# Altium PCB 宁波2号线PIS_数字功率放大器_功放板(BHC-A-2030-01)_PCB(06001536)_V1.0.PcbDoc (part 2 of 3)
Units mm, origin at the board's own origin, x right, y up, seen from the top; angles counter-clockwise.
Board outline 162 x 100 mm, 2 copper layers (Top Layer, Bottom Layer); 141 components, 101 nets, 408 pads, 79 vias.
Unrouted connection lines stored in the file: 2.
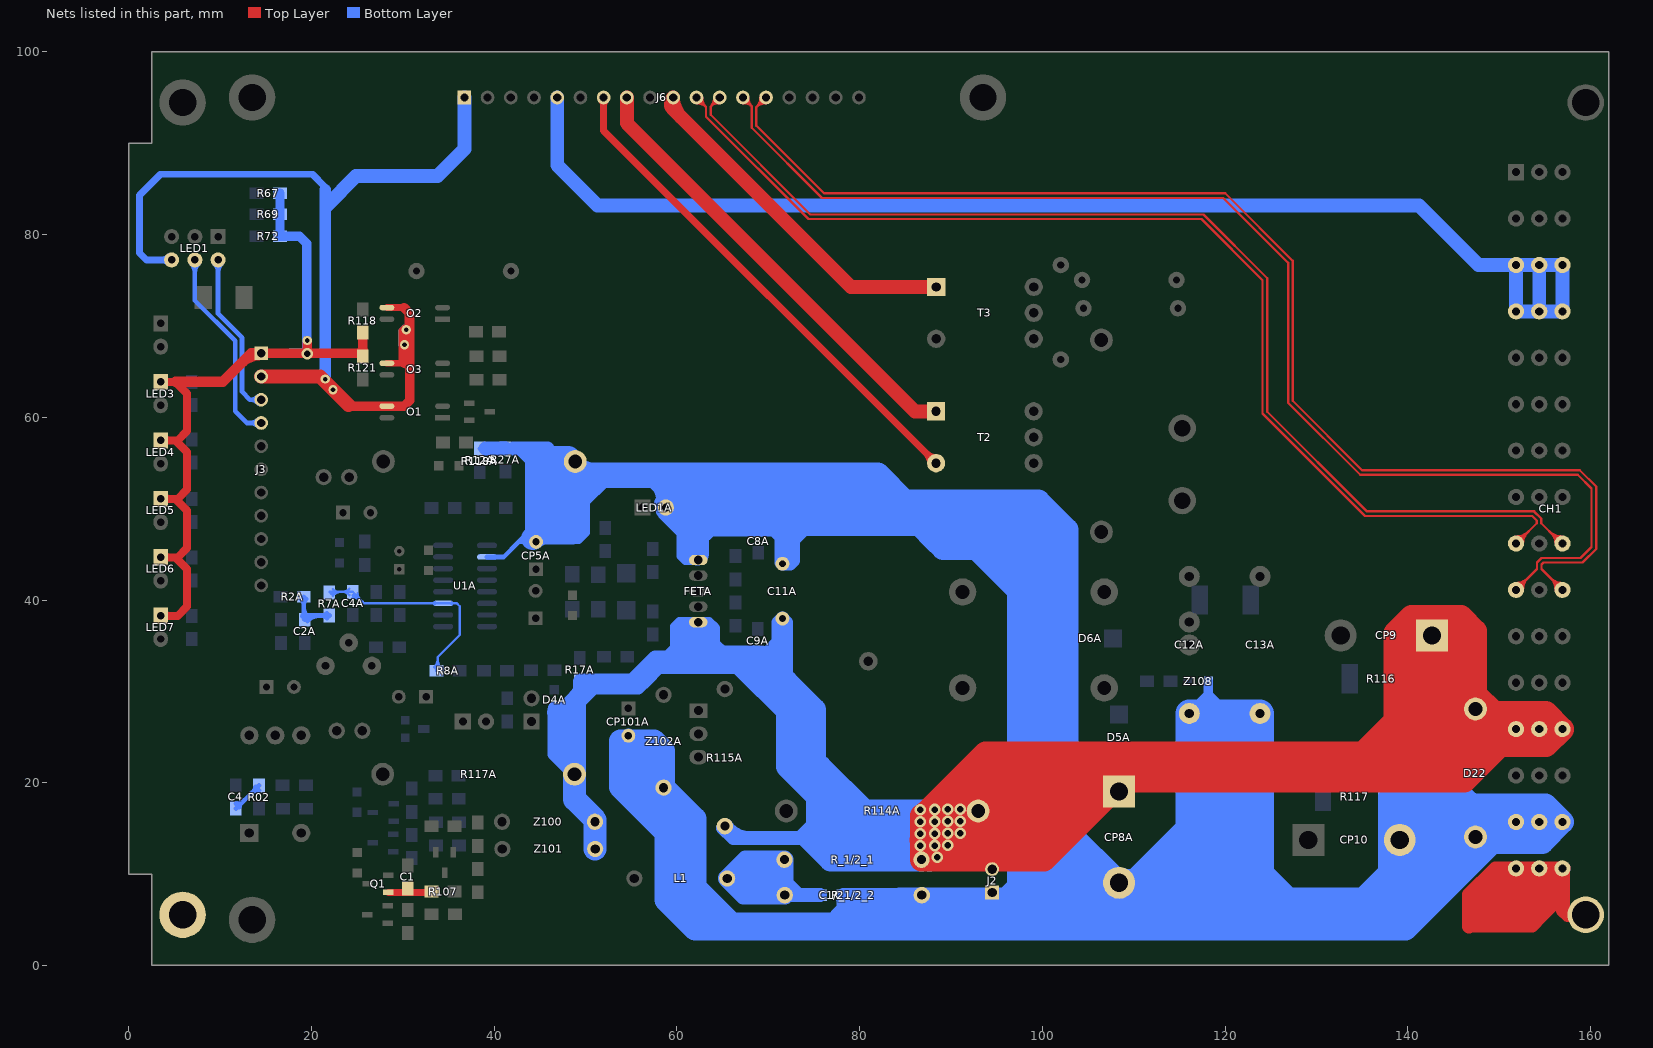
[diagram p2: the nets of this part, all layers, seen from the top]

## Via types
v1: diameter 1.016, hole 0.508, Top Layer to Bottom Layer, 57 vias
v2: diameter 1.27, hole 0.711, Top Layer to Bottom Layer, 21 vias
v3: diameter 0.762, hole 0.457, Top Layer to Bottom Layer, 1 vias

## Nets (pads, with @x,y where several pads share a name; then routed paths per layer and width w, separated by ;. In a path a pad name is that pad's centre, name@x,y a point inside that pad or via, vN(x,y) a via of type N, cw(c..) or ccw(c..) an arc to the next point about the centre after c; other vN are vias at no path point) (continued)
DC110CVGND: C1/2.1 C8A.1 C11A.1 C12A.1 C13A.1 CH1.B30 CH1.D30 CH1.Z30 CP5A.2 CP8A.2 CP10.2 CP101A.2 D6A.1 D22.2 FETA.1 J2.1 LED1A.2 R12A.1 R27A.1 R117.1 R118A.1 R_1/2_2.1 U1A.10 Z102A.1 Z108.1 | length 1336.4
  Bottom Layer w0.508: R12A.1@38.413,56.572 42.186,56.572 ; R12A.1@38.683,56.303 cw(c39.333,55.653) 39.333,56.572 cw(c39.333,57.492) R12A.1@38.683,56.842 ; U1A.10@39.213,44.711 41.057,44.711 42.711,46.364 ; 40.258,56.572 ccw(c40.258,57.578) R27A.1@40.969,56.867 ; 40.379,56.572 cw(c40.379,55.738) R27A.1@40.969,56.328 ; R27A.1@41.238,56.597 42.564,56.597 ; R27A.1@41.508,56.867 ccw(c42.158,57.517) 42.158,56.597 ccw(c42.158,55.678) 41.508,56.328 cw(c42.098,55.738) 42.098,56.572 ; R27A.1@41.514,56.86 ccw(c42.186,57.5) 42.186,56.572 ; CP5A.2@44.229,46.005 ccw(c43.361,45.138) 43.361,46.364 ccw(c43.361,47.591) CP5A.2@44.229,46.724 ; 44.827,55.607 43.862,56.572 43.837,56.597 ; CP5A.2@44.947,46.005 cw(c45.814,45.138) 45.814,46.364 cw(c45.814,47.591) CP5A.2@44.947,46.724 ; 46.812,55.607 45.847,56.572 45.822,56.597 43.837,56.597 ; 57.918,50.312 ccw(c59.131,50.045) 58.253,49.167 ; 58.238,50.889 ccw(c58.886,50.889) LED1A.2@58.803,50.247 ; LED1A.2@58.414,50.203 ccw(c60.205,49.808) 58.908,48.511 ; LED1A.2@58.868,50.751 cw(c58.961,51.467) 58.238,51.467 ; LED1A.2@58.91,50.093 ccw(c61.279,49.571) 59.564,47.856 ; LED1A.2@59.406,49.984 ccw(c62.353,49.334) 60.219,47.2 ; 61.047,44.406 cw(c61.047,43.54) FETA.1@61.659,44.152 ; 61.187,44.406 ccw(c61.187,45.073) FETA.1@61.659,44.602 ; FETA.1@61.6,44.52 cw(c60.88,44.881) 60.88,44.076 ; 62.252,45.066 61.591,44.406 61.032,44.406 60.702,44.736 60.702,46.616 60.22,46.616 ; FETA.1@62.328,44.377 62.027,44.076 60.88,44.076 ; 42.186,56.572 43.633,55.125 43.633,47.287 42.711,46.364 ; 42.564,56.597 42.589,56.572 43.256,55.905 ; 42.564,56.597 43.256,56.597 ; 42.711,46.364 43.252,46.364 ; 43.252,46.364 43.827,46.939 44.014,46.939 CP5A.2@44.588,46.364 ; 43.252,46.364 CP5A.2@44.588,46.364 ; 43.256,55.905 44.827,54.334 44.827,54.261 43.256,55.832 43.256,55.905 ; 43.256,55.905 43.256,56.572 43.256,56.597 ; 43.256,56.597 43.837,56.597 ; CP5A.2@44.588,46.364 49.3,46.364 50.237,47.302 50.237,50.629 52.117,52.509 57.197,52.509 58.238,51.467 ; 58.238,51.467 58.238,49.181 60.22,47.2 ; 60.22,46.616 60.22,44.736 60.88,44.076 ; 60.22,46.616 60.22,47.2
  Bottom Layer w1.016: C12A.1@116.078,27.584 118.161,29.667 ; Z108.1@118.161,31.115 118.161,29.693 ; 118.186,27.584 118.161,27.61 118.161,29.667 ; 120.269,27.584 118.161,29.693 ; 118.161,29.667 118.161,29.693
  Bottom Layer w1.524: R12A.1@39.047,56.597 R27A.1@41.238,56.597 ; 42.186,56.572 42.589,56.572 43.256,56.572 43.862,56.572 45.847,56.572 ; CP101A.2@54.682,25.15 54.682,24.569 54.682,21.698 55.8,20.581 55.876,20.581 ; Z102A.1@58.446,19.382 ccw(c55.876,17.228) 55.876,20.581 ; 59.051,20.581 58.543,20.581 57.997,20.581 55.876,20.581 ; 62.252,47.225 63.166,47.225 63.632,47.692 ; 63.776,48.749 64.055,48.47 ; 64.893,4.553 64.9,4.547 65.452,3.995 65.459,3.988 65.808,3.639 ; 67.682,48.47 cw(c67.682,46.553) 69.037,47.908 ccw(c68.111,46.982) 68.111,48.292 ; 68.794,3.632 84.466,3.632 84.821,3.988 86.803,5.969 101.016,5.969 105.315,5.969 106.509,7.163 106.611,7.265 106.841,7.495 CP8A.2@108.393,9.046 ; C8A.1@68.858,47.908 cw(c69.784,46.982) 69.784,48.292 ; 69.11,49.765 68.948,49.603 C8A.1@68.948,48.47 ; 71.421,45.671 ccw(c72.635,45.671) 71.777,44.812 ; 71.7,49.765 71.421,49.486 71.421,48.292 ; 72.557,45.136 cw(c71.777,45.916) 71.777,44.812 ; 74.418,48.292 72.716,46.59 ; 76.566,4.547 78.201,6.182 ; C1/2.1@78.249,7.596 ccw(c79.306,8.919) 80.503,7.722 ; R_1/2_2.1@86.549,7.722 82.51,7.722 ; CP8A.2@107.405,9.046 cw(c105.019,9.046) 106.706,7.36 cw(c108.393,5.673) CP8A.2@108.393,8.058 ; 142.801,9.046 D22.2@146.924,13.17 ; 144.733,10.979 ccw(c141.111,14.601) 146.233,14.601 ; 145.362,13.17 D22.2@146.924,13.17 ; 145.542,13.256 145.807,13.256 ; 145.769,13.17 ccw(c145.769,15.553) D22.2@147.454,13.868 ; D22.2@148.152,13.17 D22.2@146.924,13.17 ; 63.632,47.692 64.833,47.692 ; 63.632,47.692 64.233,48.292 ; 64.055,48.47 64.233,48.292 ; 64.055,48.47 C8A.1@68.948,48.47 ; 64.233,48.292 C8A.1@68.948,48.292 ; 64.233,48.292 64.833,47.692 ; 64.833,47.692 C8A.1@68.948,47.692 ; C8A.1@68.948,47.692 C8A.1@68.948,48.292 ; C8A.1@68.948,47.692 70.65,47.692 71.421,46.921 ; C8A.1@68.948,48.292 C8A.1@68.948,48.47 ; C8A.1@68.948,48.292 71.421,48.292 ; 71.421,45.168 71.421,44.101 C11A.1@71.552,43.97 ; 71.421,45.168 71.421,46.921 ; 71.421,45.168 71.552,45.037 C11A.1@71.552,43.97 ; 71.421,46.921 71.421,48.292 ; 71.421,48.292 72.716,48.292 72.716,46.59 ; C11A.1@71.552,43.97 72.367,43.97 72.716,44.319 72.716,46.59 ; 71.777,44.812 ccw(c70.565,46.59) 72.716,46.59 ; 78.201,6.182 78.228,6.208 C1/2.1@78.228,7.722 ; 78.201,6.182 78.201,4.868 78.522,4.547 78.522,7.427 80.097,5.853 80.097,4.547 82.51,6.96 82.51,7.722 ; 78.201,6.182 C1/2.1@78.201,7.695 C1/2.1@78.228,7.722 ; C1/2.1@78.228,7.722 80.503,7.722 ; 80.503,7.722 79.513,6.731 79.513,6.503 81.291,6.503 82.51,7.722 ; 80.503,7.722 82.51,7.722
  Bottom Layer w1.778: 134.576,7.239 137.613,10.276 ; 139.355,7.163 137.613,8.905 137.613,10.276 ; 139.522,9.271 137.613,11.18 ; D22.2@147.454,13.868 147.454,14.009 147.454,15.545 147.454,15.71 147.454,17.57 146.025,18.999 138.121,18.999 R117.1@137.613,18.491 137.613,11.18 ; 137.613,10.276 137.613,11.18
  Bottom Layer w2.54: CP5A.2@44.229,46.724 cw(c45.747,45.206) 45.747,47.352 ; 44.827,54.334 44.827,55.607 R118A.1@48.1,55.607 ; 46.504,52.28 cw(c50.618,52.28) R118A.1@47.709,55.19 ; 46.504,53.273 cw(c48.632,53.273) R118A.1@47.714,55.194 ; R118A.1@47.703,55.176 ccw(c49.831,55.176) 48.326,53.67 ; R118A.1@47.703,55.177 ccw(c49.435,55.021) 48.205,53.791 ; R118A.1@47.705,55.184 ccw(c50.064,54.025) 48.205,52.166 ; R118A.1@47.709,55.161 ccw(c51.017,58.469) 51.017,53.791 ; R118A.1@47.74,55.165 cw(c45.297,56.65) 45.297,53.791 ; 57.741,53.565 cw(c54.297,50.121) LED1A.2@59.167,50.121 ; Z102A.1@58.27,19.729 ccw(c59.625,18.412) 58.289,17.076 ; 58.391,17.076 58.289,17.076 ; Z102A.1@58.739,19.137 cw(c57.533,21.145) 55.876,19.489 ; LED1A.2@58.786,50.502 cw(c58.786,45.631) 62.231,49.075 ; 64.893,4.553 65.96,4.553 61.947,8.567 61.947,16.06 60.296,17.711 ; 65.452,3.995 61.998,3.995 ; 72.716,48.292 74.418,48.292 86.506,48.292 ; 84.781,49.765 82.419,49.765 ; 97.5,11.938 97.5,8.738 ; 100.239,14.097 101.041,13.295 ; 101.016,5.969 101.041,5.995 101.041,7.265 ; 101.671,9.614 104.02,7.265 ; 106.509,7.163 114.098,7.163 ; 106.611,7.265 104.02,7.265 ; 106.841,7.495 101.041,13.295 ; 106.936,7.59 ccw(c107.966,8.62) 107.966,7.163 ; CP8A.2@108.001,9.324 cw(c104.02,12.142) 104.02,7.265 ; CP8A.2@108.393,9.046 102.672,14.767 102.672,47.696 99.543,50.825 84.938,50.825 ; CP8A.2@108.732,9.386 ccw(c114.098,14.752) 114.098,7.163 ; 123.76,7.239 126.568,7.239 134.576,7.239 ; 139.598,7.163 139.355,7.163 ; 142.316,12.573 142.316,13.157 142.265,13.208 ; D22.2@146.701,14.6 ccw(c148.152,14.621) D22.2@148.152,13.17 ; D22.2@146.703,14.592 ccw(c148.918,15.606) 148.918,13.17 ; D22.2@147.396,14.067 147.454,14.009 147.963,13.5 154.71,13.5 CH1.Z30@156.92,15.71 ; 147.454,15.545 147.289,15.71 ; 45.297,53.791 46.58,53.791 ; 45.297,53.791 44.827,54.261 44.827,47.352 46.504,47.352 ; 46.504,47.352 48.51,47.352 ; 46.504,47.352 46.504,53.715 46.58,53.791 ; 46.58,53.791 48.205,53.791 ; 46.58,53.791 48.205,52.166 ; 48.205,52.166 48.205,53.791 ; 48.205,53.791 48.51,53.486 48.51,47.352 ; 48.205,53.791 61.02,53.791 ; 48.51,47.352 49.171,48.013 49.171,50.985 51.914,53.728 57.578,53.728 59.204,52.102 ; 55.876,19.489 55.876,20.581 55.876,22.968 57.476,24.569 ; 55.876,19.489 58.289,17.076 ; 57.476,24.569 57.997,24.048 ; 57.476,24.569 54.682,24.569 53.819,24.569 53.819,19.539 58.797,14.561 58.797,7.195 61.998,3.995 ; 57.997,24.048 58.543,23.502 58.543,20.581 Z102A.1@58.543,19.463 ; 57.997,24.048 57.997,20.581 57.997,20.009 Z102A.1@58.543,19.463 ; Z102A.1@58.543,19.463 60.296,17.711 ; 59.204,52.102 62.252,49.054 ; 59.204,52.102 59.204,49.943 61.375,47.771 ; 60.296,17.711 60.296,15.399 60.448,15.247 60.448,8.084 63.217,5.315 63.369,5.315 64.138,4.547 64.9,4.547 76.566,4.547 78.522,4.547 80.097,4.547 81.697,4.547 84.415,7.265 R_1/2_2.1@86.549,7.265 ; 61.02,53.791 62.252,52.559 ; 61.02,53.791 78.393,53.791 ; 61.375,47.771 62.252,46.895 ; 61.375,47.771 61.375,45.943 62.252,45.066 62.252,46.895 ; 61.998,3.995 62.004,3.988 65.459,3.988 84.821,3.988 ; 62.252,46.895 62.252,47.225 ; 62.252,47.225 62.252,49.054 ; 62.252,47.225 63.776,48.749 64.792,49.765 69.11,49.765 71.7,49.765 82.419,49.765 ; 62.252,49.054 62.252,52.559 ; 62.252,52.559 62.328,52.483 ; 62.328,52.483 63.623,51.188 80.997,51.188 ; 62.328,52.483 79.701,52.483 ; 78.393,53.791 81.972,53.791 84.938,50.825 ; 78.393,53.791 79.701,52.483 ; 79.701,52.483 80.997,51.188 ; 80.997,51.188 81.359,50.825 ; 81.359,50.825 82.419,49.765 ; 81.359,50.825 84.938,50.825 ; 84.821,3.988 139.736,3.988 148.918,13.17 ; 84.821,3.988 84.821,5.537 R_1/2_2.1@86.549,7.265 ; 84.938,50.825 86.563,49.2 95.174,49.2 ; 86.506,48.292 88.24,46.558 ; 86.506,48.292 92.678,48.292 93.739,47.231 ; R_1/2_2.1@86.549,7.265 96.027,7.265 ; 88.24,46.558 94.412,46.558 ; 88.24,46.558 89.154,45.644 92.761,45.644 97.394,41.01 97.394,8.632 ; 93.739,47.231 94.412,46.558 ; 93.739,47.231 95.567,47.231 96.241,46.558 ; 94.412,46.558 99.238,41.732 99.238,7.265 ; 94.412,46.558 96.241,46.558 ; 95.174,49.2 97.815,46.558 ; 95.174,49.2 97.765,49.2 101.041,45.923 101.041,41.758 ; 96.027,7.265 97.394,8.632 ; 96.027,7.265 97.394,7.265 ; 96.241,46.558 97.815,46.558 ; 96.241,46.558 98.247,44.552 ; 97.394,7.265 97.394,8.632 ; 97.394,7.265 97.5,7.265 ; 97.394,8.632 97.5,8.738 ; 97.5,7.265 99.238,7.265 ; 97.5,7.265 97.5,8.738 ; 97.815,46.558 98.247,46.126 ; 97.815,46.558 98.4,46.558 98.45,46.507 98.247,46.507 98.247,46.126 ; 98.247,44.552 98.247,46.126 ; 98.247,44.552 99.504,43.294 ; 98.247,46.126 99.504,44.869 99.504,43.294 ; 99.238,7.265 101.041,7.265 ; 99.504,43.294 101.041,41.758 ; 101.041,7.265 104.02,7.265 ; 101.041,7.265 101.041,13.295 ; 101.041,13.295 101.041,41.758 ; 104.02,7.265 105.315,5.969 105.925,5.36 137.552,5.36 139.355,7.163 ; 114.098,7.163 115.316,7.163 116.611,7.163 120.04,7.163 139.355,7.163 ; 139.355,7.163 145.362,13.17 146.721,14.529 146.721,14.601 147.454,13.868 D22.2@148.152,13.17 ; 140.132,15.342 140.132,12.598 140.894,11.836 142.265,13.208 ; 140.132,15.342 139.954,15.519 140.132,15.519 ; 140.132,15.342 140.132,15.519 ; 140.132,15.342 142.265,13.208 ; 140.132,15.519 140.132,15.977 140.589,15.519 ; 140.132,15.519 140.589,15.519 ; 140.589,15.519 142.621,15.519 142.672,15.469 ; 140.589,15.519 140.64,15.469 142.672,15.469 ; 142.265,13.208 143.027,13.97 143.027,15.113 142.672,15.469 ; 142.672,15.469 145.415,15.469 141.445,11.499 141.445,9.304 139.112,11.637 CP10.2@139.112,13.741 139.112,17.09 139.573,17.551 143.7,17.551 ; 143.7,17.551 143.719,17.57 147.454,17.57 155.06,17.57 CH1.Z30@156.92,15.71 ; 143.7,17.551 143.77,17.551 ; 143.77,17.551 145.612,15.71 147.289,15.71 ; 143.77,17.551 145.447,17.551 147.289,15.71 ; 147.289,15.71 147.454,15.71 CH1.D30@151.84,15.71 CH1.B30@154.38,15.71 CH1.Z30@156.92,15.71 ; D22.2@148.152,13.17 148.918,13.17 ; R118A.1@47.737,55.19 cw(c45.87,53.323) 48.51,53.323 ccw(c45.87,53.323) R118A.1@47.737,55.19
  Bottom Layer w3.048: CP8A.2@108.393,9.046 110.223,9.046 ; 115.316,7.163 121.209,13.056 ; 116.611,7.163 119.431,9.982 121.209,9.982 ; 120.04,7.163 121.209,8.331 121.209,9.79 ; 120.04,25.451 121.691,25.451 ; 123.76,7.239 121.209,9.79 ; 126.568,7.239 123.825,9.982 ; 110.223,9.046 113.974,9.046 118.516,13.589 118.516,25.146 C12A.1@116.078,27.584 ; 110.223,9.046 116.078,14.902 C12A.1@116.078,27.584 ; C12A.1@116.078,27.584 118.186,27.584 120.269,27.584 C13A.1@123.825,27.584 ; 121.209,9.79 121.209,9.982 ; 121.209,9.982 121.209,13.056 ; 121.209,9.982 123.825,9.982 ; 121.209,13.056 121.209,24.968 121.691,25.451 ; 121.691,25.451 C13A.1@123.825,27.584 ; 123.825,9.982 C13A.1@123.825,27.584
DC110V+: C9A.2 C11A.2 CH1.B26 CH1.D26 CH1.Z26 CP8A.1 CP9.1 D4A.2 D5A.2 D22.1 FETA.5 J2.2 R17A.2 R114A.2 R115A.2 R116.2 R117A.2 R_1/2_1.2 Z100.2 Z101.2 | length 1049.7
  Top Layer w1.524: v2@86.582,14.526 cw(c87.232,13.499) v2@87.966,14.468 ; v2@86.591,12.994 ccw(c87.195,14.145) v2@88.04,13.158 ; v2@86.677,12.983 ccw(c86.407,14.215) 87.47,13.535 ; v2@86.677,14.295 ccw(c86.407,15.528) 87.47,14.847 ; v2@86.677,14.543 cw(c86.395,13.237) 87.518,13.961 ; v2@86.708,14.306 ccw(c86.315,15.077) v2@87.135,15.354 ; v2@86.711,13.218 cw(c86.264,12.406) R_1/2_1.2@87.147,12.122 ; R_1/2_1.2@86.766,11.583 R_1/2_1.2@86.817,11.633 ; R_1/2_1.2@86.817,11.093 cw(c89.227,11.093) v2@88.142,13.245 ; R_1/2_1.2@86.817,11.412 cw(c91.232,11.412) v2@88.11,14.534 ; R_1/2_1.2@86.817,11.583 R_1/2_1.2@86.817,11.633 ; v2@86.817,12.724 cw(c91.232,12.724) v2@88.11,15.846 ; v2@86.817,16.164 ccw(c91.232,16.164) v2@88.11,13.042 ; R_1/2_1.2@86.98,11.797 R_1/2_1.2@86.817,11.633 ; 86.98,16.459 v2@86.817,16.296 ; v2@88.153,14.326 cw(c88.936,16.296) v2@86.817,16.296 ; R_1/2_1.2@86.817,11.633 v2@86.817,16.296 ; 87.376,16.855 cw(c88.2,16.031) 88.2,17.196 ccw(c88.2,16.031) 87.376,16.855
  Top Layer w2.54: 86.746,13.734 cw(c86.65,13.106) 87.162,13.482 ; v2@86.766,12.516 cw(c90.128,12.516) 87.751,14.893 ccw(c89.61,13.034) v2@86.98,13.034 ; v2@86.766,13.828 cw(c90.128,13.828) 87.751,16.206 ccw(c89.61,14.346) v2@86.98,14.346 ; 86.766,15.06 ccw(c90.128,15.06) 87.751,12.683 ; 86.767,16.419 ccw(c86.645,17.072) 87.193,16.697 ; 86.772,13.73 cw(c86.623,12.966) 87.269,13.4 ; 86.772,15.042 cw(c86.623,14.278) 87.269,14.712 ; 86.776,12.484 ccw(c86.637,13.17) 87.22,12.783 ; 86.776,13.796 ccw(c86.637,14.482) 87.22,14.095 ; 86.776,15.109 ccw(c86.637,15.794) 87.22,15.407 ; 86.776,16.421 ccw(c86.637,17.107) 87.22,16.72 ; R_1/2_1.2@86.98,11.722 cw(c89.61,11.722) 87.751,13.581 cw(c90.039,11.292) v2@90.039,14.529 ; R_1/2_1.2@86.98,11.797 86.98,16.459 ; v2@86.98,14.542 ccw(c89.61,14.542) 87.751,12.683 ; v2@86.98,15.855 ccw(c89.61,15.855) 87.751,13.995 ccw(c89.283,15.528) v2@89.283,13.361 ; R_1/2_1.2@87.353,11.583 ccw(c87.353,15.426) 90.071,12.708 ; 87.594,13.324 cw(c89.241,12.801) v2@89.241,14.529 ; 87.654,15.432 ccw(c89.241,16.375) v2@89.241,14.529 ; 87.751,15.308 ccw(c89.63,17.187) v2@89.63,14.529 ; 87.773,13.974 cw(c89.829,16.245) 86.766,16.245 R_1/2_1.2@86.766,11.583 R_1/2_1.2@86.817,11.583 ; v2@88.055,12.286 cw(c90.651,9.69) 90.651,13.361 ; 88.084,15.132 cw(c88.33,16.459) 86.98,16.459 ; 88.2,16.434 ccw(c88.2,18.151) v2@89.414,16.937 ; v2(88.2,17.069) 92.34,21.209 135.382,21.209 140.437,26.264 ; 88.758,13.709 ccw(c90.174,13.709) 89.173,12.708 ccw(c91.891,15.426) 91.891,11.583 ; 88.758,13.918 cw(c90.174,13.918) 89.173,14.919 ; 88.758,15.022 ccw(c90.174,15.022) 89.173,14.021 ccw(c90.767,15.614) 90.767,13.361 ; 88.758,15.23 cw(c90.174,15.23) 89.173,16.231 ; 88.758,16.282 v2@88.758,13.361 ; 88.784,12.883 cw(c86.817,13.721) R_1/2_1.2@86.817,11.583 ; v2@88.987,13.157 cw(c91.685,13.157) v2@89.777,15.065 ; 88.987,14.455 cw(c91.416,14.513) v2@89.698,16.231 ; v2@88.987,14.47 cw(c91.522,14.47) v2@89.729,16.262 ; v2@88.987,15.782 cw(c90.745,15.782) v2@89.502,17.025 ; 88.994,14.563 cw(c91.044,14.26) v2@91.044,16.332 ; 89.112,12.779 cw(c90.191,13.579) v2@89.241,14.529 ; v2@89.173,13.606 cw(c91.4,11.379) v2@91.4,14.529 ; 89.173,15.333 ccw(c91.114,17.274) v2@91.114,14.529 ; v2@89.466,14.529 ccw(c89.466,17.361) v2@91.468,15.358 ; v2@89.813,13.361 ccw(c89.813,15.701) v2@91.468,14.046 ; 90.158,14.129 cw(c88.758,15.019) v2@88.758,13.361 ; v2@90.384,14.495 cw(c93.225,14.495) 91.216,16.504 ; 90.407,11.583 cw(c90.407,15.34) v2@87.751,12.683 ; v2@90.57,14.046 ccw(c92.225,15.701) 92.225,13.361 ; 90.57,14.944 cw(c93.922,11.593) R114A.2@93.922,16.332 ; v2@90.57,15.358 ccw(c92.572,17.361) 92.572,14.529 ; v2@90.57,16.671 ccw(c91.387,17.488) 91.387,16.332 ; 90.651,16.332 ccw(c90.651,17.488) v2@91.468,16.671 ; v2@90.715,16.003 cw(c92.969,13.749) R114A.2@92.969,16.937 ; v2@90.989,16.277 cw(c88.2,19.067) 88.2,15.122 ; 91.068,15.174 ccw(c90.981,16.298) 91.837,15.565 ; 91.133,15.12 ccw(c90.751,13.019) v2@89.241,14.529 ; 91.153,16.49 ccw(c90.995,17.135) 91.562,16.791 ; 91.654,14.504 ccw(c89.8,14.478) v2@89.8,16.332 ; R114A.2@92.987,16.908 cw(c89.241,18.668) v2@89.241,14.529 ; 100.366,14.529 92.568,14.529 ; 102.17,16.332 R114A.2@92.568,16.332 ; CP8A.1@106.856,18.25 100.188,11.583 R_1/2_1.2@86.817,11.583 ; 86.98,16.459 93.762,23.241 135.077,23.241 138.608,26.772 138.608,28.702 ; 88.2,15.122 ccw(c88.2,16.062) 88.864,15.397 cw(c88.2,16.062) 88.2,15.122 ; 88.517,16.519 ccw(c88.13,17.19) 88.878,16.99 ; 88.517,16.519 ccw(c88.13,17.19) 88.878,16.99 ; 88.517,16.519 ccw(c88.13,17.19) 88.878,16.99 ; 88.517,16.519 ccw(c88.13,17.19) 88.878,16.99 ; v2@88.758,13.361 92.568,13.361 ; v2@89.173,16.645 ccw(c89.929,17.401) v2@89.929,16.332 ; v2@89.173,16.645 ccw(c89.929,17.401) v2@89.929,16.332 ; v2@89.173,16.645 ccw(c89.929,17.401) v2@89.929,16.332 ; v2@89.241,14.529 v2@91.044,16.332 ; v2@89.241,14.529 92.568,14.529 ; v2@89.8,16.332 v2@91.044,16.332 ; v2@89.8,16.332 89.698,16.231 89.698,16.419 92.568,19.289 92.568,19.101 ; v2@89.8,16.332 92.568,19.101 ; v2@91.044,16.332 ccw(c92.671,14.706) 90.389,14.415 cw(c92.671,14.706) v2@91.044,16.332 ; v2@91.044,16.332 cw(c92.586,14.791) 92.973,16.936 ccw(c92.586,14.791) v2@91.044,16.332 ; v2@91.044,16.332 R114A.2@92.568,16.332 ; 91.607,16.332 ccw(c91.607,18.279) R114A.2@92.983,16.902 ; 91.607,16.332 ccw(c91.607,18.279) R114A.2@92.983,16.902 ; 91.607,16.332 ccw(c91.607,18.279) R114A.2@92.983,16.902 ; 92.568,13.361 99.35,13.361 106.183,20.193 137.033,20.193 ; 92.568,13.361 92.568,14.529 ; 92.568,14.529 R114A.2@92.568,16.332 ; R114A.2@92.568,16.332 92.568,19.101 ; 92.568,19.101 93.152,19.685 104.8,19.685 102.743,17.628 93.708,17.628 R114A.2@92.983,16.902 ; 137.033,20.193 138.316,21.476 ; 137.033,20.193 139.598,20.193 ; 138.316,21.476 138.608,21.768 ; 138.316,21.476 138.024,21.768 138.608,21.768 ; 138.316,21.476 139.598,20.193 ; 138.608,21.768 140.437,23.597 140.437,26.264 ; 138.608,21.768 143.942,21.768 142.011,23.698 142.011,28.702 ; 138.608,28.702 140.437,28.702 ; 138.608,28.702 140.437,30.531 ; 138.608,28.702 138.608,36.398 140.386,38.176 145.821,38.176 147.396,36.601 147.396,34.493 ; 139.598,20.193 142.824,20.193 ; 140.437,26.264 140.437,28.702 ; 140.437,28.702 140.437,30.531 ; 140.437,28.702 142.011,28.702 ; 140.437,30.531 141.821,31.915 ; 140.437,30.531 140.437,35.027 ; 140.437,35.027 140.97,34.493 CP9.1@142.011,34.493 ; 140.437,35.027 140.437,38.125 CP9.1@142.697,35.865 ; 141.821,31.915 141.427,32.309 142.011,32.309 ; 141.821,31.915 142.011,31.725 ; 141.821,31.915 142.011,32.106 ; 142.011,28.702 143.739,28.702 ; 142.011,28.702 142.011,31.725 ; 142.011,31.725 143.815,29.921 ; 142.011,31.725 142.011,32.106 ; 142.011,32.106 142.215,32.309 ; 142.011,32.106 142.011,32.309 ; 142.011,32.309 CP9.1@142.011,34.493 ; 142.011,32.309 142.215,32.309 ; CP9.1@142.011,34.493 142.011,35.179 CP9.1@142.697,35.865 ; CP9.1@142.011,34.493 145.567,34.493 ; 142.215,32.309 142.265,32.36 145.263,32.36 ; 142.215,32.309 145.212,32.309 145.263,32.36 ; CP9.1@142.697,35.865 145.364,35.865 145.567,35.662 145.567,34.493 ; 142.824,20.193 145.567,20.193 ; 142.824,20.193 145.567,22.936 ; 143.739,28.702 145.567,26.873 ; 143.739,28.702 143.739,24.765 145.567,22.936 ; 143.739,28.702 143.739,29.845 143.815,29.921 ; 143.739,28.702 145.034,28.702 143.815,29.921 ; 143.815,29.921 145.567,31.674 ; 145.263,32.36 145.567,32.664 ; 145.263,32.36 145.567,32.36 ; 145.567,20.193 146.163,20.193 150.035,24.065 ; 145.567,20.193 145.567,22.936 ; 145.567,22.936 145.567,26.873 ; 145.567,22.936 146.759,22.936 149.643,25.82 ; 145.567,26.873 146.621,25.82 149.643,25.82 ; 145.567,26.873 145.567,31.674 ; 145.567,31.674 145.567,32.36 ; 145.567,32.36 145.567,32.664 ; 145.567,32.664 145.567,34.493 ; 145.567,32.664 147.396,34.493 ; 145.567,34.493 147.396,34.493 ; 147.396,29.7 147.396,34.493 ; 147.396,29.7 D22.1@147.396,28.067 149.643,25.82 ; 147.396,29.7 149.396,27.7 155.09,27.7 CH1.Z26@156.92,25.87 ; 149.643,25.82 CH1.D26@151.79,25.82 ; 150.035,24.065 CH1.D26@151.79,25.82 ; 150.035,24.065 155.115,24.065 CH1.Z26@156.87,25.82 ; CH1.D26@151.79,25.82 CH1.Z26@156.87,25.82 ; CH1.D26@151.79,25.82 CH1.D26@151.84,25.87 CH1.B26@154.38,25.87 CH1.Z26@156.92,25.87 ; CH1.Z26@156.87,25.82 CH1.Z26@156.92,25.87 ; CH1.Z26@156.87,25.82 156.92,25.82 CH1.Z26@156.92,25.87 ; 88.2,13.809 ccw(c88.2,14.586) 88.749,14.037 cw(c88.2,14.586) 88.2,13.809 ; 88.517,13.682 cw(c88.107,12.972) 88.899,13.184 ccw(c88.107,12.972) 88.517,13.682 ; 88.517,13.894 ccw(c88.13,14.566) 88.878,14.365 cw(c88.13,14.566) 88.517,13.894 ; 88.517,14.994 cw(c88.107,14.284) 88.899,14.496 ccw(c88.107,14.284) 88.517,14.994 ; 88.517,15.207 ccw(c88.13,15.878) 88.878,15.677 cw(c88.13,15.878) 88.517,15.207 ; v2@91.069,15.088 ccw(c90.816,15.916) 91.58,15.509 cw(c90.816,15.916) v2@91.069,15.088
  Bottom Layer w1.143: 59.813,34.475 59.813,36.227 ; 60.654,37.068 cw(c61.883,35.838) FETA.5@61.883,37.577 ; FETA.5@61.629,37.577 ccw(c62.668,37.577) 61.933,36.843 ; 63.087,36.818 cw(c63.845,37.577) FETA.5@62.772,37.577 ; 63.741,34.255 64.131,34.645 ; 63.885,34.892 cw(c66.57,37.577) FETA.5@62.772,37.577 ; 64.002,37.068 ccw(c62.772,35.838) FETA.5@62.772,37.577 ; 66.214,33.205 65.164,34.255 64.131,35.287 ; 59.813,36.227 59.813,37.091 60.299,37.577 FETA.5@62.328,37.577 ; 59.813,36.227 61.159,37.573 61.744,37.573 62.328,36.989 62.328,36.448 64.131,34.645 ; FETA.5@62.328,37.577 64.131,35.774 ; FETA.5@62.328,37.577 63.493,37.577 64.131,36.938 64.131,35.774 ; 64.131,34.645 64.131,35.287 ; 64.131,35.287 64.131,35.774
  Bottom Layer w1.524: D4A.2@46.522,27.7 ccw(c46.729,28.628) 47.401,27.956 ; D4A.2@46.579,27.694 ccw(c46.579,29.047) 47.536,28.09 ; D4A.2@46.675,28.199 cw(c46.256,27.133) 47.401,27.133 ; D4A.2@46.764,28.141 cw(c45.226,26.603) 47.401,26.603 ; R117A.2@48.798,20.936 47.143,22.592 ; 48.84,29.394 ccw(c47.247,30.986) R17A.2@49.499,30.986 ; R17A.2@49.47,31.068 cw(c48.253,30.055) 49.372,28.936 ; R17A.2@49.477,31.058 cw(c48.744,30.555) 49.372,29.927 ; 62.328,36.448 62.328,35.668 63.741,34.255 65.164,34.255 C9A.2@68.922,34.255 ; 62.328,36.989 59.813,34.475 59.077,33.738 ; R115A.2@65.248,15.251 65.054,15.057 66.166,13.945 73.493,13.945 ; R115A.2@65.363,15.327 ccw(c67.916,17.007) 67.916,13.951 66.251,13.951 R115A.2@65.579,14.623 ; 68.226,33.205 68.897,33.205 71.12,35.428 ; 69.821,33.205 71.12,34.504 71.12,35.428 ; 71.12,36.021 71.12,35.428 ; 72.132,27.134 66.595,32.671 58.01,32.671 ; 72.785,30.24 71.958,31.067 71.958,37.564 C11A.2@71.552,37.97 71.12,37.538 71.12,35.428 ; 74.484,13.945 73.493,13.945 ; 75.119,15.57 73.493,13.945 ; 75.307,21.368 77.408,19.267 79.752,16.923 ; 47.143,22.592 46.579,23.156 D4A.2@46.579,27.956 47.401,27.956 ; 47.143,22.592 47.401,22.85 47.401,27.956 ; 47.401,27.956 48.392,27.956 48.798,28.362 49.372,28.936 ; 47.401,27.956 49.372,29.927 ; 49.372,28.936 50.847,30.411 55.749,30.411 56.537,31.198 ; 49.372,28.936 49.372,29.927 ; 49.372,29.927 R17A.2@49.372,31.113 49.457,31.198 55.089,31.198 ; 55.089,31.198 56.537,31.198 ; 55.089,31.198 56.537,32.646 ; 56.537,31.198 56.537,32.646 ; 56.537,31.198 58.01,32.671 ; 56.537,32.646 57.629,33.738 59.077,33.738 ; 58.01,32.671 59.077,33.738
  Bottom Layer w2.032: D5A.2@108.382,22.483 108.393,22.472 CP8A.1@108.393,19.046
  Bottom Layer w2.54: 48.798,28.362 R117A.2@48.798,20.936 48.798,18.184 51.05,15.933 Z101.2@51.05,12.758 ; 66.214,33.205 63.572,33.205 ; 68.897,33.205 69.821,33.205 71.958,31.067 75.032,27.994 75.032,21.772 ; C9A.2@69.371,33.679 cw(c68.226,34.824) 68.226,33.205 67.535,33.205 67.535,33.176 72.132,28.579 72.132,27.309 ; 75.307,21.368 75.032,21.644 75.032,21.772 ; 75.383,15.501 75.383,18.52 72.132,21.772 72.132,27.134 72.132,27.309 ; 75.804,15.774 76.084,15.494 78.37,15.494 ; 77.408,19.267 77.408,18.89 75.434,16.917 79.759,16.917 ; 79.752,16.923 79.759,16.917 ; 83.87,13.945 ccw(c83.87,18.511) 87.099,15.282 ; 84.443,15.494 ccw(c84.443,19.251) 87.099,16.595 ; 84.504,11.583 ccw(c84.504,15.253) v2@87.099,12.658 ; 85.322,16.917 cw(c85.322,14.403) v2@87.099,16.18 ; 85.358,13.945 ccw(c85.358,18.598) 88.649,15.308 ; 85.587,15.494 cw(c85.587,13.356) 87.099,14.868 ; 85.931,15.494 ccw(c85.931,19.338) 88.649,16.62 ; 86.02,15.657 ccw(c87.946,15.884) v2@87.946,13.945 ; 86.16,13.945 cw(c86.16,12.616) 87.099,13.556 ; 86.201,13.556 cw(c87.141,12.616) 87.141,13.945 ; 86.201,14.868 cw(c87.713,13.356) v2@87.713,15.494 ; v2@86.201,16.18 cw(c87.979,14.403) v2@87.979,16.917 ; 86.201,16.595 ccw(c88.858,19.251) 88.858,15.494 ; R_1/2_1.2@86.65,12.472 ccw(c86.65,16.995) 89.849,13.797 ; 86.65,13.784 ccw(c86.65,16.523) v2@88.587,14.586 ; R_1/2_1.2@86.766,11.583 76.846,11.583 74.484,13.945 78.37,13.945 ; v2@86.932,16.917 cw(c86.932,14.489) v2@88.649,16.206 ; v2@87.198,15.494 cw(c87.198,13.443) 88.649,14.893 ; 87.292,15.494 ccw(c87.292,19.425) 90.071,16.645 ; v2@87.565,13.132 cw(c88.607,13.132) 87.87,13.869 ; 87.596,16.872 ccw(c89.495,17.492) 89.495,15.494 cw(c88.477,16.512) 87.981,15.161 ; R_1/2_1.2@87.635,11.583 R114A.2@92.969,16.917 ; R_1/2_1.2@87.659,11.607 ccw(c84.822,14.444) 88.835,14.444 ; 87.751,14.893 cw(c89.201,13.443) v2@89.201,15.494 ; v2@87.751,16.206 cw(c89.467,14.489) v2@89.467,16.917 ; 87.77,13.945 cw(c87.77,12.703) v2@88.649,13.581 ; v2@88.182,14.181 ccw(c86.607,15.757) 88.835,15.757 ; 88.2,12.497 ccw(c88.2,13.341) 88.797,12.744 ; 88.2,13.809 ccw(c88.2,17.822) v2@91.037,14.985 ; v2@88.416,16.917 cw(c88.416,14.576) v2@90.071,16.231 ; 88.433,13.854 ccw(c88.031,14.873) v2@89.035,14.436 ; 88.518,13.681 cw(c87.99,12.77) v2@89.008,13.041 ; 88.587,12.535 ccw(c87.99,13.132) 88.835,13.132 ; v2@88.682,15.494 cw(c88.682,13.529) 90.071,14.919 ; v2@88.74,14.74 cw(c89.622,13.858) v2@89.622,15.105 ; v2@89.142,13.089 ccw(c86.449,15.782) 90.257,15.782 ; v2@89.173,16.231 cw(c90.828,14.576) v2@90.828,16.917 ; 89.622,13.835 ccw(c89.622,14.475) 90.075,14.022 ; 89.622,15.147 ccw(c89.622,18.955) R114A.2@92.315,16.262 ; 90.07,14.017 ccw(c89.617,14.47) 90.257,14.47 ; 90.57,16.256 cw(c92.164,14.663) R114A.2@92.164,16.917 ; 90.737,16.551 ccw(c91.598,18.287) R114A.2@92.969,16.917 ; 91.056,15.129 ccw(c90.821,11.07) v2@87.946,13.945 ; R116.2@140.534,31.394 140.534,34.01 CP9.1@142.643,36.119 ; 63.572,33.205 61.845,34.932 61.54,34.932 60.372,33.763 60.931,33.205 63.572,33.205 ; 72.132,27.309 73.736,25.705 73.736,21.996 73.511,21.772 75.032,21.772 ; 75.032,21.772 75.623,21.772 80.478,16.917 ; 78.37,13.945 79.868,13.945 ; 78.37,13.945 78.37,15.494 ; 78.37,15.494 79.868,15.494 ; 79.759,16.917 79.868,16.917 ; 79.868,13.945 79.868,15.494 ; 79.868,13.945 v2@87.946,13.945 ; 79.868,15.494 81.9,15.494 ; 79.868,15.494 79.868,16.917 ; 79.868,16.917 80.478,16.917 ; 80.478,16.917 81.9,15.494 ; 80.478,16.917 R114A.2@92.164,16.917 ; 81.9,15.494 89.495,15.494 v2@87.946,13.945 ; R114A.2@92.164,16.917 R114A.2@92.969,16.917 ; v2@90.036,16.035 cw(c91.019,15.053) 91.019,16.442 ccw(c91.019,15.053) v2@90.036,16.035
  other v2: 88.504,11.837 86.65,13.107 88.2,13.132 89.622,13.157 86.65,14.419 88.2,14.444 89.622,14.47 91.019,14.495 86.65,15.731 88.2,15.757 89.622,15.782 91.019,15.807 86.65,17.044 89.622,17.094 91.019,17.12
DC+3.3V: J3.1 LED3.1 LED4.1 LED5.1 LED6.1 LED7.1 R67.2 R69.2 R72.2 R118.1 R121.1 | length 110.3
  Top Layer w0.889: LED7.1@3.5,38.27 5.37,38.27 6.4,39.3 6.4,43.4 5.13,44.67 LED6.1@3.5,44.67 5.37,44.67 6.4,45.7 6.4,49.8 5.13,51.07 LED5.1@3.5,51.07 5.37,51.07 6.4,52.1 6.4,56.2 5.13,57.47 LED4.1@3.5,57.47 5.37,57.47 6.4,58.5 6.4,62.6 5.13,63.87 LED3.1@3.5,63.87 ; LED7.1@3.742,38.028 cw(c4.328,37.442) 4.328,38.27 cw(c4.328,39.098) LED7.1@3.742,38.512 ; LED3.1@3.742,63.628 cw(c4.328,63.042) 4.328,63.87 cw(c4.328,64.698) LED3.1@3.742,64.112 ; 4.328,44.67 cw(c4.328,45.498) 3.742,44.912 ccw(c4.328,45.498) 4.328,44.67 ; 4.328,44.67 ccw(c4.328,43.842) 3.742,44.428 cw(c4.328,43.842) 4.328,44.67 ; 4.328,51.07 cw(c4.328,51.898) 3.742,51.312 ccw(c4.328,51.898) 4.328,51.07 ; 4.328,51.07 ccw(c4.328,50.242) 3.742,50.828 cw(c4.328,50.242) 4.328,51.07 ; 4.328,57.47 cw(c4.328,58.298) 3.742,57.712 ccw(c4.328,58.298) 4.328,57.47 ; 4.328,57.47 ccw(c4.328,56.642) 3.742,57.228 cw(c4.328,56.642) 4.328,57.47
  Top Layer w1.016: J3.1@14.5,67 v2@19.542,67 ; v2(19.542,66.973) v2@19.542,67 ; v1(19.542,68.4) v2@19.542,67 ; 24.801,67 cw(c24.801,65.99) R121.1@25.515,66.704 ; R118.1@25.623,69.274 25.605,69.255 25.605,67.333 R121.1@25.605,66.667 25.272,67 v2@19.542,67
  Top Layer w1.143: 5.13,63.87 10.27,63.87 13.4,67 J3.1@14.5,67 ; 12.317,65.917 cw(c14.5,63.735) J3.1@14.5,66.822 ; R121.1@25.272,67 R121.1@25.605,67.333
  Bottom Layer w1.016: J3.1@14.5,67 14.527,66.973 17.727,66.973 ; R72.2@16.54,79.8 18.7,79.8 19.492,79.008 v2@19.492,66.973 ; R72.2@16.55,79.87 R67.2@16.55,84.518 ; v2(19.542,66.973) v2@19.492,66.973 ; 17.727,66.973 v2@19.492,66.973 ; 17.727,66.973 17.7,67 19.465,67 v2@19.492,66.973
DC+24V: CH1.B6 CH1.B8 CH1.D6 CH1.D8 CH1.Z6 CH1.Z8 J6.5 | length 142.3
  Bottom Layer w1.524: J6.5@46.9,95 46.9,87.6 51.3,83.2 141.2,83.2 147.73,76.67 CH1.D6@151.84,76.67 ; CH1.D6@151.84,76.67 CH1.B6@154.38,76.67 ; CH1.D6@151.84,76.67 CH1.D8@151.84,71.59 CH1.B8@154.38,71.59 ; CH1.B8@154.38,71.59 CH1.Z8@156.92,71.59 CH1.Z6@156.92,76.67 CH1.B6@154.38,76.67 ; CH1.B8@154.38,71.59 CH1.B6@154.38,76.67
DGND: J3.2 J6.1 J6.8 J6.10 LED1.6 O1.3 O2.3 O3.3 T2.1 T3.1 | length 218.4
  Top Layer w0.508: 30.166,65.913 30.331,65.913
  Top Layer w0.762: 24.038,61.36 24.184,61.214 ; O3.3@28.256,65.913 30.166,65.913 ; O2.3@28.256,72.009 30.127,72.009
  Top Layer w1.016: 24.184,61.214 O1.3@28.256,61.214 30.141,61.214 30.769,61.842 30.769,65.475 ; 30.127,72.009 30.718,71.418 ; 30.166,65.913 30.166,66.338 ; 30.185,65.932 30.718,66.465 30.718,71.418 ; 30.331,65.913 30.769,65.475 ; 30.718,71.418 30.769,71.367 30.769,65.475
  Top Layer w1.27: 30.166,66.338 30.185,66.357 v1(30.185,67.938) ; v1(30.185,67.938) 30.363,68.116 v1(30.363,69.589) 30.185,69.412 v1(30.185,67.938)
  Top Layer w1.524: J3.2@14.5,64.46 20.938,64.46 24.038,61.36 ; J6.8@54.52,95 54.52,92.18 86.045,60.655 T2.1@88.367,60.655 ; J6.10@59.588,95 ccw(c62.697,95) 60.499,92.801 ; J6.10@59.591,95.008 ccw(c60.258,94.359) 59.6,93.7 ; J6.10@59.6,95 59.6,93.7 ; T3.1@88.377,74.27 79.03,74.27 59.6,93.7
  Bottom Layer w0.762: LED1.6@4.385,76.916 ccw(c3.626,76.157) 3.626,77.23 ccw(c3.626,78.303) LED1.6@4.385,77.544 ; LED1.6@4.699,77.23 1.97,77.23 1.2,78 1.2,84.3 3.5,86.6 20.1,86.6 21.5,85.2
  Bottom Layer w1.27: 21.5,84.9 21.5,63.873 v1(22.362,63.011) ; v1(30.363,69.589) v1@30.363,69.234 ; v1@30.363,69.234 30.363,68.116 v1(30.185,67.938) 30.185,69.412 v1@30.363,69.234
  Bottom Layer w1.524: 21.7,83.2 24.9,86.4 33.8,86.4 36.74,89.34 J6.1@36.74,95
  other v1: 21.524,64.179
EARTH: CH1.0 CH1.B32 CH1.D32 CH1.Z32 pad.7 | length 108.7
  Top Layer w1.524: 146.696,4.242 146.696,7.747 149.579,10.63 151.92,10.63 154.46,10.63 157,10.63 157,7.815 ; 147.102,4.394 cw(c151.64,4.394) 148.431,7.603 ; 151.054,8.6 ccw(c149.024,10.63) CH1.D32@151.895,10.63 ; CH1.D32@151.896,10.639 cw(c150.48,11.161) 150.48,9.652 ; 152.222,9.728 ccw(c152.222,12.868) 154.442,10.648 cw(c152.106,12.89) 152.106,9.652 ; 154.158,9.728 cw(c154.158,12.868) 151.938,10.648 ccw(c154.342,13.052) 154.342,9.652 ; CH1.B32@154.482,10.643 ccw(c156.119,11.651) 156.119,9.728 ; 154.646,9.652 152.106,9.652 ; 154.762,9.728 ccw(c154.762,12.868) CH1.Z32@156.982,10.648 ; 154.824,7.265 151.065,7.265 150.15,6.35 154.443,6.35 154.849,6.757 154.849,8.408 151.471,8.408 148.474,5.41 154.595,5.41 ; 156.119,8.442 cw(c159.188,8.442) CH1.Z32@157.018,10.612 ; 156.119,9.37 cw(c157.423,9.37) CH1.Z32@157.008,10.606 ; CH1.0@157.5,5.5 157,6 157,7.815 ; 146.848,4.394 152.106,9.652 ; 146.848,4.394 153.579,4.394 154.595,5.41 ; 146.848,4.394 146.848,6.02 150.48,9.652 ; 150.48,9.652 152.106,9.652 ; 152.106,9.652 152.182,9.728 156.119,9.728 156.119,6.934 ; 154.595,5.41 156.119,6.934 ; 156.119,6.934 157,7.815
I_SAMPLING: J6.7 T2.2 | length 58.8
  Top Layer w0.762: J6.7@51.719,94.739 cw(c51.089,94.109) 51.98,94.109 cw(c52.871,94.109) J6.7@52.241,94.739 ; J6.7@51.98,95 51.98,91.362 T2.2@88.367,54.975 ; T2.2@87.748,54.975 ccw(c86.253,54.975) 87.31,56.032 ccw(c88.367,57.089) T2.2@88.367,55.594
LEDLINK: J3.4 LED1.4 | length 25.8
  Bottom Layer w0.508: LED1.4@6.835,76.826 cw(c5.859,75.85) 7.239,75.85 cw(c8.619,75.85) LED1.4@7.643,76.826 ; LED1.4@7.239,77.23 7.239,72.783 11.643,68.379 11.643,60.674 12.937,59.38 J3.4@14.5,59.38 ; J3.4@14.149,59.029 ccw(c13.303,58.183) 13.303,59.38 ccw(c13.303,60.577) J3.4@14.149,59.731
LEDSPEED: J3.3 LED1.2 | length 22
  Bottom Layer w0.508: LED1.2@9.375,76.826 cw(c8.399,75.85) 9.779,75.85 cw(c11.159,75.85) LED1.2@10.183,76.826 ; LED1.2@9.779,77.23 9.779,71.321 12.405,68.695 12.405,62.782 13.267,61.92 J3.3@14.5,61.92 ; J3.3@14.149,61.569 ccw(c13.303,60.723) 13.303,61.92 ccw(c13.303,63.117) J3.3@14.149,62.271
MB_RX_N: CH1.Z20 J6.14 | length 146.6
  Top Layer w0.254: J6.14@69.137,94.999 cw(c67.645,94.995) 68.7,93.94 cw(c69.755,92.885) J6.14@69.759,94.377 ; J6.14@69.391,94.999 cw(c68.507,94.997) 69.132,94.372 cw(c69.757,93.747) J6.14@69.759,94.631 ; J6.14@69.76,95 68.7,93.94 68.7,91.9 76.092,84.508 120.01,84.508 127.4,77.118 127.4,61.8 134.992,54.208 158.81,54.208 160.608,52.41 160.608,45.59 159.118,44.1 154.834,44.1 154.634,43.9 154.634,43.396 CH1.Z20@156.92,41.11 ; CH1.Z20@156.158,41.11 ccw(c154.318,41.11) 155.619,42.411 ccw(c156.92,43.712) CH1.Z20@156.92,41.872 ; CH1.Z20@156.412,41.11 ccw(c155.186,41.11) 156.053,41.977 ccw(c156.92,42.844) CH1.Z20@156.92,41.618
MB_RX_P: CH1.D20 J6.13 | length 146.1
  Top Layer w0.254: J6.13@67.22,95 68.192,94.028 ; J6.13@67.244,94.632 cw(c67.291,93.92) 67.796,94.424 cw(c68.3,94.929) J6.13@67.588,94.976 ; J6.13@67.261,94.378 cw(c67.34,93.176) 68.192,94.028 ; J6.13@67.842,94.959 ccw(c69.044,94.88) 68.192,94.028 ; CH1.D20@151.84,41.11 154.126,43.396 154.126,44.11 154.624,44.608 158.908,44.608 160.1,45.8 160.1,52.2 158.6,53.7 134.782,53.7 126.892,61.59 126.892,76.908 119.8,84 75.882,84 68.192,91.69 68.192,94.028 ; CH1.D20@151.84,41.618 ccw(c151.84,42.844) 152.707,41.977 ccw(c153.574,41.11) CH1.D20@152.348,41.11 ; CH1.D20@151.84,41.872 ccw(c151.84,43.712) 153.141,42.411 ccw(c154.442,41.11) CH1.D20@152.602,41.11
MB_TX_N: CH1.Z18 J6.12 | length 131.9
  Top Layer w0.254: J6.12@64.058,94.963 cw(c62.83,94.89) 63.7,94.02 cw(c64.57,93.15) J6.12@64.643,94.378 ; J6.12@64.312,94.978 cw(c63.584,94.935) 64.1,94.42 cw(c64.615,93.904) J6.12@64.658,94.632 ; J6.12@64.68,95 63.7,94.02 63.7,93.1 74.6,82.2 117.618,82.2 124.608,75.21 124.608,60.61 135.518,49.7 153.818,49.7 154.608,48.91 154.608,48.4 156.818,46.19 CH1.Z18@156.92,46.19 ; 155.445,47.563 ccw(c156.92,49.038) CH1.Z18@156.92,46.952 ; 155.691,47.317 cw(c154.565,46.19) CH1.Z18@156.158,46.19 ; 155.879,47.129 ccw(c156.92,48.171) CH1.Z18@156.92,46.698 ; 156.125,46.883 cw(c155.432,46.19) CH1.Z18@156.412,46.19
MB_TX_P: CH1.D18 J6.11 | length 132.3
  Top Layer w0.254: J6.11@62.14,95 63.192,93.948 ; J6.11@62.143,94.631 cw(c62.15,93.763) 62.763,94.377 cw(c63.377,94.99) J6.11@62.509,94.997 ; J6.11@62.145,94.377 cw(c62.156,92.912) 63.192,93.948 ; J6.11@62.763,94.995 ccw(c64.228,94.984) 63.192,93.948 ; CH1.D18@151.84,46.19 151.89,46.19 154.1,48.4 154.1,48.7 153.608,49.192 135.308,49.192 124.1,60.4 124.1,75 117.408,81.692 74.39,81.692 63.192,92.89 63.192,93.948 ; CH1.D18@151.84,46.698 ccw(c151.84,48.045) 152.793,47.093 ; CH1.D18@151.84,46.952 ccw(c151.84,48.912) 153.226,47.526 ; CH1.D18@152.348,46.19 cw(c153.454,46.19) 152.672,46.972 ; CH1.D18@152.602,46.19 cw(c154.321,46.19) 153.105,47.405
NetC1/2_2: C1/2.2 L1.2 R_1/2_1.1 R_1/2_2.2 | length 35.4
  Bottom Layer w1.524: R_1/2_2.2@71.766,7.733 R_1/2_2.2@71.803,7.696 R_1/2_2.2@71.803,7.696 73.316,7.695 ; 71.766,9.246 73.316,7.695 ; C1/2.2@75.661,7.695 73.316,7.695
  Bottom Layer w2.032: 68.732,10.744 67.64,10.744 66.599,9.703 66.878,9.423 69.607,9.423 R_1/2_1.1@71.766,11.583 ; 69.988,8.865 71.766,10.643 ; R_1/2_2.2@71.766,7.733 71.766,9.246 71.766,10.643 ; R_1/2_2.2@71.803,7.696 67.338,7.696 L1.2@65.503,9.532 67.554,11.583 R_1/2_1.1@71.766,11.583 ; 71.766,10.643 R_1/2_1.1@71.766,11.583
NetC1_2: C1.2 Q1.1 R107.2 | length 6.7
  Top Layer w0.762: Q1.1@28.426,7.998 33.039,7.998 R107.2@33.135,8.093 ; 29.804,7.998 ccw(c29.804,8.764) C1.2@30.346,8.222 ; C1.2@30.705,8.222 ccw(c31.247,8.764) 31.247,7.998 ; 32.163,7.998 ccw(c32.163,8.938) R107.2@32.828,8.273
NetC2A_2: C2A.2 R2A.2 R7A.1 | length 11.4
  Bottom Layer w0.508: R2A.2@18.887,40.107 cw(c18.236,39.457) 19.156,39.457 cw(c20.076,39.457) R2A.2@19.425,40.107 ; C2A.2@18.993,38.24 ccw(c18.601,38.632) 19.156,38.632 ; 19.156,39.148 ccw(c20.44,39.148) C2A.2@19.532,38.24 ; R2A.2@19.156,40.377 19.156,37.95 C2A.2@19.263,37.843 19.718,38.299 R7A.1@21.97,38.299 ; C2A.2@19.532,37.701 cw(c20.975,36.258) 20.975,38.299 ; R7A.1@21.7,38.029 ccw(c21.05,37.379) 21.05,38.299 ccw(c21.05,39.219) R7A.1@21.7,38.568
NetC4_2: C4.2 R02.2 | length 6.5
  Bottom Layer w0.508: C4.2@11.732,17.186 11.748,17.186 R02.2@14.262,19.7 ; C4.2@11.732,17.694 ccw(c11.732,18.959) 12.626,18.065 ; C4.2@12.113,17.313 cw(c12.688,17.313) C4.2@12.282,17.72 ; 13.394,18.833 cw(c14.262,17.966) R02.2@14.262,19.192 ; R02.2@13.701,19.139 ccw(c13.267,19.573) R02.2@13.881,19.573
NetC4A_1: C4A.1 R7A.2 R8A.1 U1A.3 | length 34
  Bottom Layer w0.254: R7A.2@21.97,40.839 22.021,40.89 C4A.1@24.53,40.89 25.789,39.631 U1A.3@34.413,39.631 35.926,39.631 36.231,39.326 36.231,36.176 33.818,33.763 33.818,32.421 R8A.1@33.667,32.27 ; R7A.2@22.149,40.659 cw(c22.706,40.103) 22.706,40.89 ; R7A.2@22.329,40.48 cw(c23.319,39.489) 23.319,40.89 ; R7A.2@22.329,41.198 ccw(c23.073,41.942) 23.073,40.89 ; C4A.1@24.171,40.531 ccw(c23.304,39.663) 23.304,40.89 ccw(c23.304,42.116) C4A.1@24.171,41.249 ; C4A.1@24.53,40.255 cw(c24.53,38.722) 25.614,39.806 ; C4A.1@24.53,40.509 cw(c24.53,39.589) 25.181,40.239 ; C4A.1@25.038,40.763 ccw(c25.958,40.763) 25.308,40.112 ; R8A.1@33.435,32.629 ccw(c32.51,33.554) 33.818,33.554 ; U1A.3@33.491,39.508 ccw(c33.195,39.213) 33.195,39.631 ccw(c33.195,40.048) U1A.3@33.491,39.753 ; R8A.1@33.615,32.45 ccw(c33.123,32.941) 33.818,32.941 ; 33.818,33.439 ccw(c34.963,33.439) R8A.1@34.153,32.629 ; U1A.3@35.335,39.508 cw(c35.631,39.213) 35.631,39.631 cw(c35.631,40.048) U1A.3@35.335,39.753